# Allegro board version2.brd
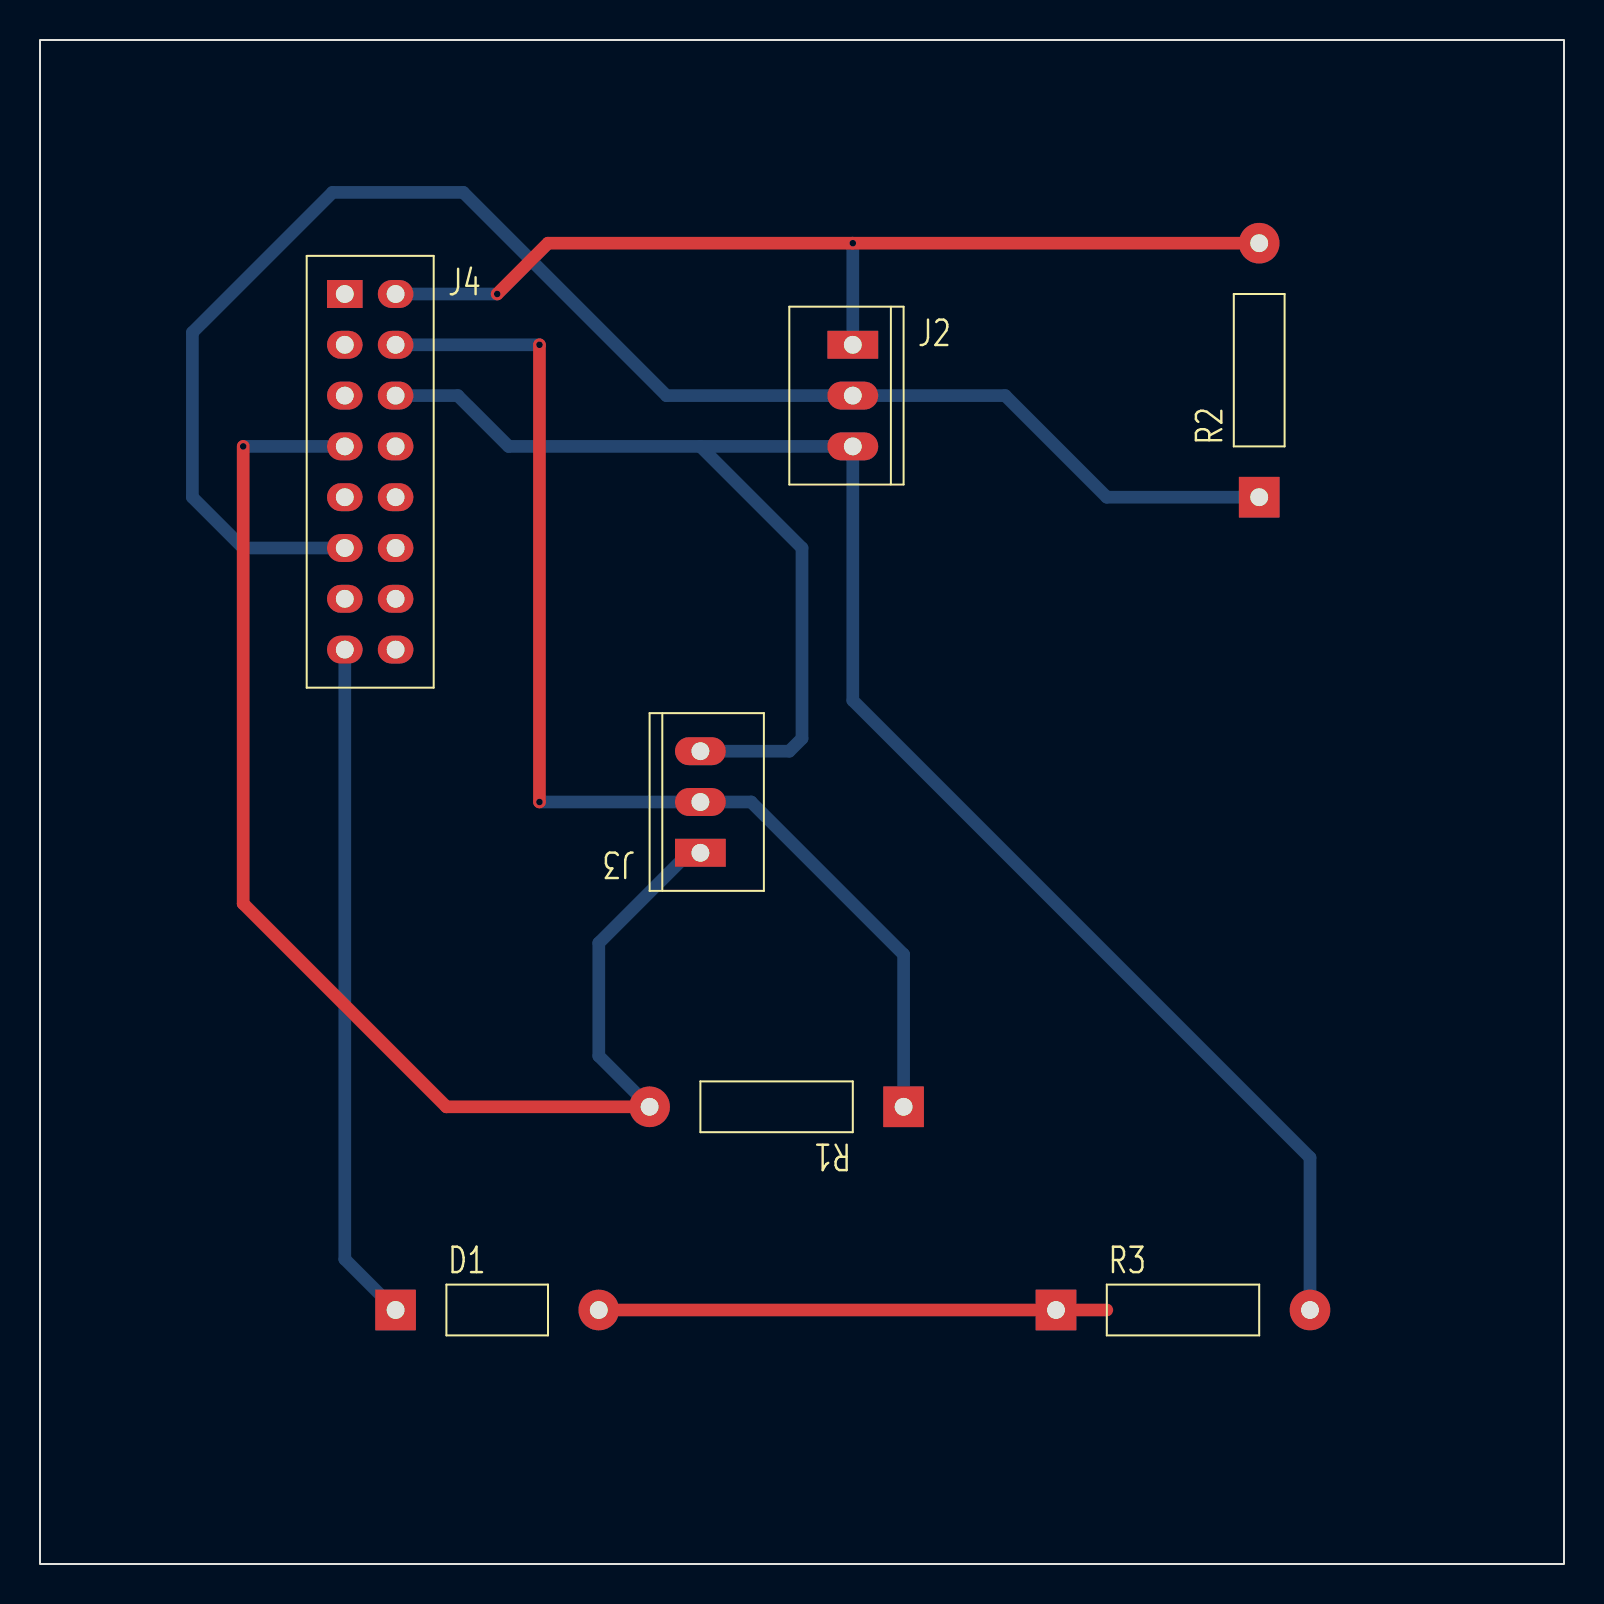
[diagram p0: board, top side]
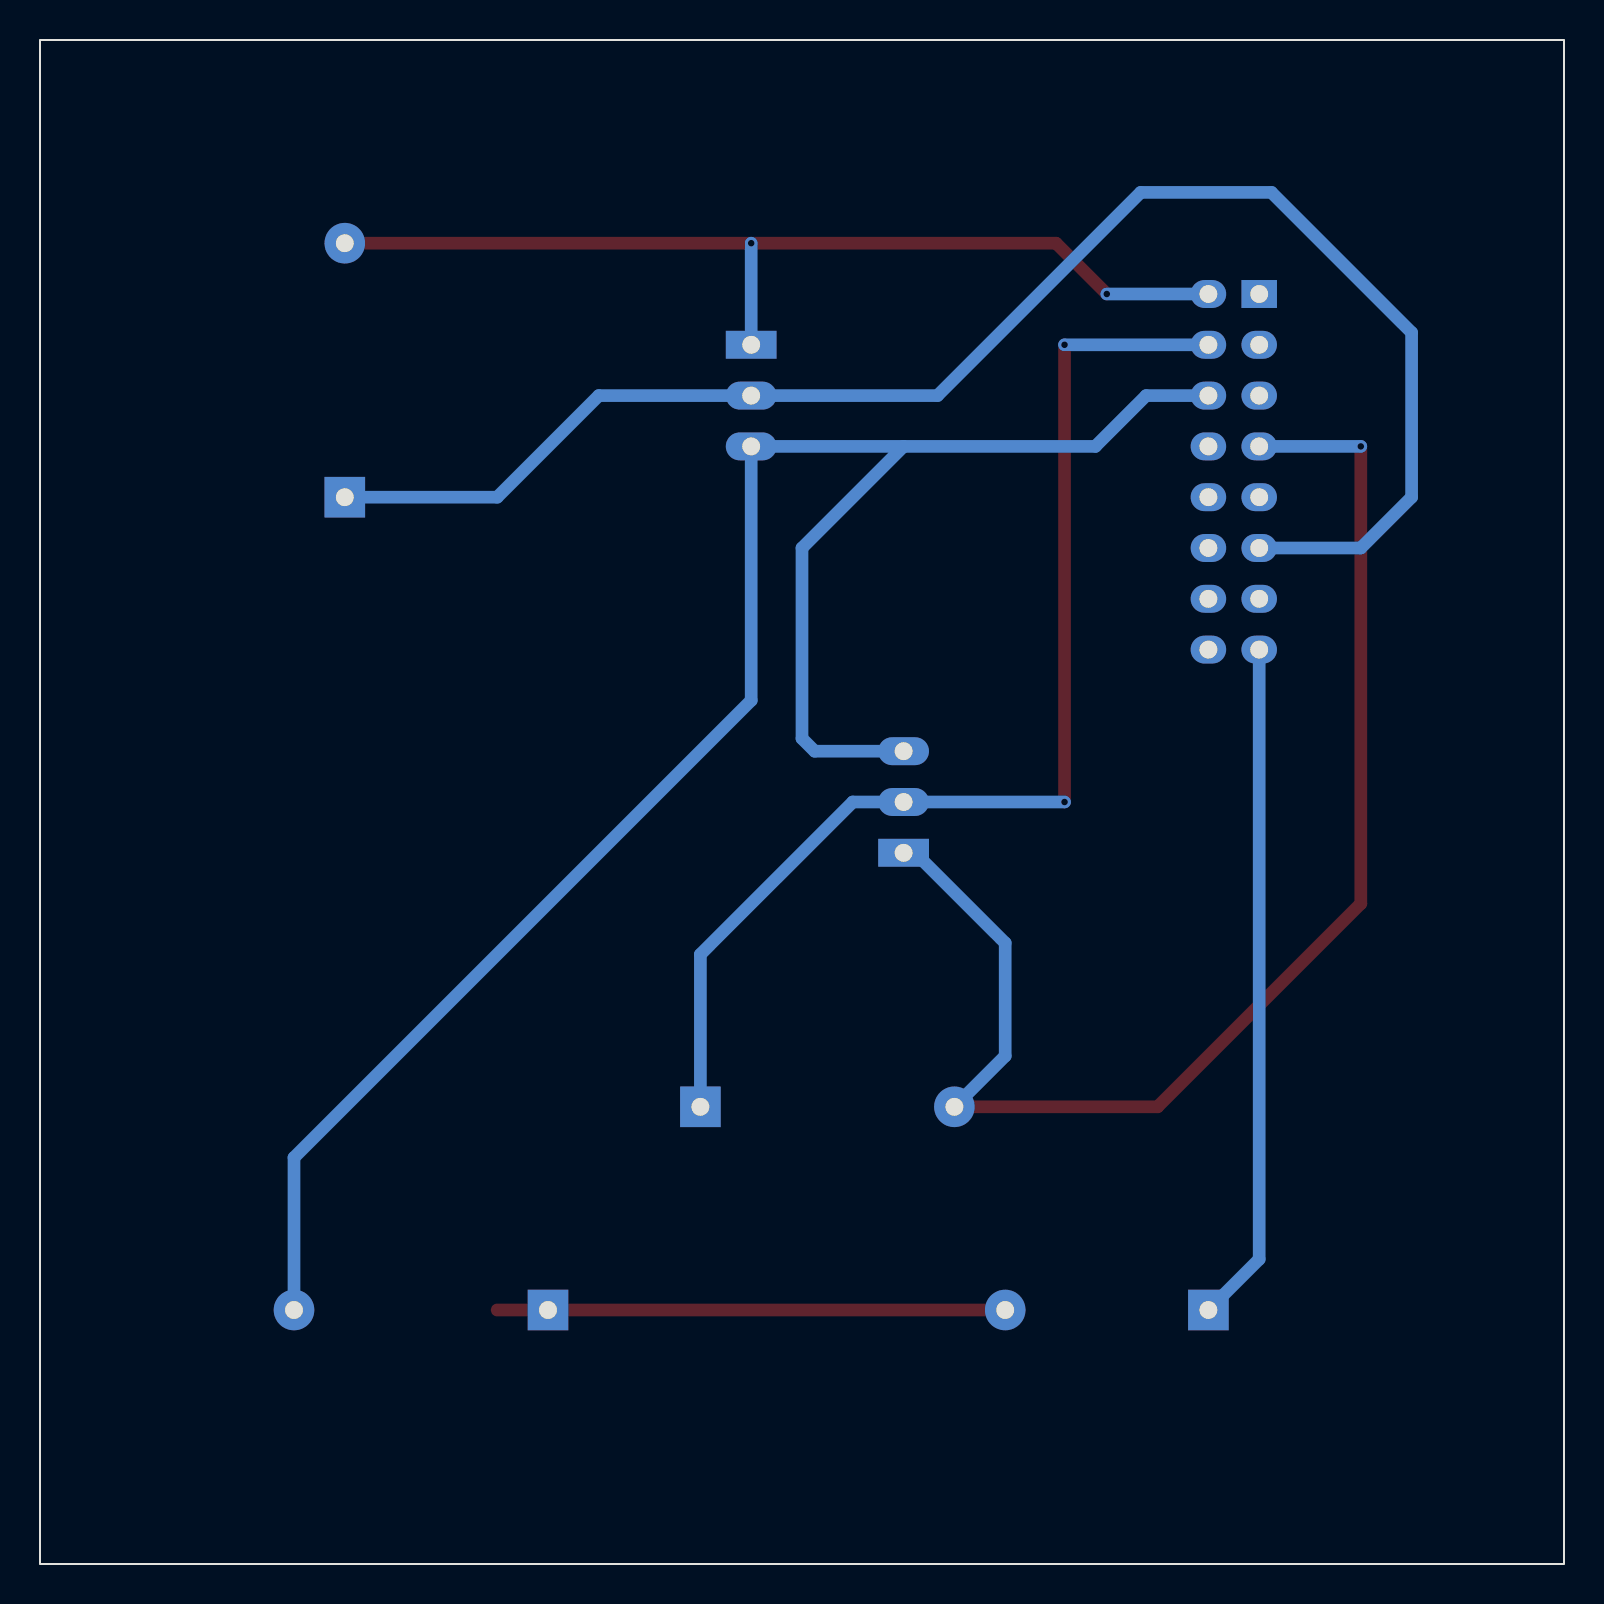
[diagram p1: board, bottom side, seen from below]

Outline 76.2 x 76.2 mm; copper layers: TOP, BOTTOM. Coordinates in mm from the lower left corner of the outline.
Outline path: rectangle 0,0 76.2,76.2

## Design rules (mm)
constraint set DEFAULT: min track width 0.635

## Placement (name value [footprint] x y rotation side)
D1  LED  [GU-RC400]  17.78 12.7 0 top
J2  HEADER 3  [GU-MOLEX3]  40.64 60.96 0 top
J3  HEADER 3  [GU-MOLEX3]  33.02 35.56 180 top
J4  HEADER 8X2  [GU-HEADER16]  15.24 63.5 0 top
R1  RESISTOR  [GU-RC500]  43.18 22.86 180 top
R2  RESISTOR  [GU-RC500]  60.96 53.34 90 top
R3  RESISTOR  [GU-RC500]  50.8 12.7 0 top

## Library data of the parts
D1 = LED
J2 J3 = HEADER 3
J4 = HEADER 8X2
R1-R3 = RESISTOR

## Footprints (pads in the part's own frame, mm; a bottom-side part is the same pattern mirrored in y, then rotated)
GU-HEADER16
  rect 1.778x1.397 hole 0.889: 1(0,0)
  oval 1.778x1.397 hole 0.889: 2(2.54,0) 3(0,-2.54) 4(2.54,-2.54) 5(0,-5.08) 6(2.54,-5.08) 7(0,-7.62) 8(2.54,-7.62) 9(0,-10.16) 10(2.54,-10.16) 11(0,-12.7) 12(2.54,-12.7) 13(0,-15.24) 14(2.54,-15.24) 15(0,-17.78) 16(2.54,-17.78)
GU-MOLEX3
  rect 2.54x1.397 hole 0.889: 1(0,0)
  oval 2.54x1.397 hole 0.889: 2(0,-2.54) 3(0,-5.08)
GU-RC400
  rect 2.032x2.032 hole 0.889: 1(0,0)
  round 2.032 hole 0.889: 2(10.16,0)
GU-RC500
  rect 2.032x2.032 hole 0.889: 1(0,0)
  round 2.032 hole 0.889: 2(12.7,0)

## Nets
GND: J2.3 J3.3 J4.6 R3.2
N02271: J2.1 J4.2 R2.2
N02296: J2.2 J4.11 R2.1
N02415: J3.2 J4.4 R1.1
N02433: J3.1 J4.7 R1.2
N02494: D1.1 J4.15
N02506: D1.2(CATHODE) R3.1

Pads without a net: J4 1 3 5 8 9 10 12 13 14 16

## Via types
v1: diameter 0.61, hole 0.33, TOP to BOTTOM, 5 vias

## Routing (per net, layer and track width the routed paths; a pad name or vN(x,y) marks a point on that pad's centre or on a via; arc(x,y) is an arc through that point)
GND: length 98.6
  BOTTOM w0.635: 33.02,55.88 J2.3 40.64,43.18 63.5,20.32 R3.2 ; 33.02,55.88 23.43,55.88 20.89,58.42 J4.6 ; 33.02,55.88 38.1,50.8 38.1,41.27 37.47,40.64 J3.3
N02271: length 49.3
  TOP w0.635: v1(22.86,63.5) 25.4,66.04 v1(40.64,66.04) R2.2
  BOTTOM w0.635: J4.2 v1(22.86,63.5) ; J2.1 v1(40.64,66.04)
N02296: length 79.5
  BOTTOM w0.635: R2.1 53.34,53.34 48.26,58.42 J2.2 31.32,58.42 21.16,68.58 14.63,68.58 7.62,61.57 7.62,53.34 10.16,50.8 J4.11
N02415: length 59
  TOP w0.635: v1(24.97,60.96) v1(24.97,38.1)
  BOTTOM w0.635: v1(24.97,38.1) J3.2 35.56,38.1 43.18,30.48 R1.1 ; J4.4 v1(24.97,60.96)
N02433: length 68.7
  TOP w0.635: R1.2 20.32,22.86 10.16,33.02 v1(10.16,55.88)
  BOTTOM w0.635: J4.7 v1(10.16,55.88) ; R1.2 27.94,25.4 27.94,31.05 32.45,35.56 J3.1
N02494: length 34.1
  BOTTOM w0.635: D1.1 15.24,15.24 J4.15
N02506: length 25.4
  TOP w0.635: D1.2 R3.1 53.34,12.7
